# Altium PCB FCM_Integrated.PcbDoc (part 2 of 2)
Units mil, origin at the board's own origin, x right, y up, seen from the top; angles counter-clockwise.
Board outline 7020 x 5005 mil, 4 copper layers (Top Layer, Power, Ground, Bottom Layer), stack 23.756 mil thick; 143 components, 84 nets, 455 pads, 96 vias.
Unrouted connection lines stored in the file: 35.
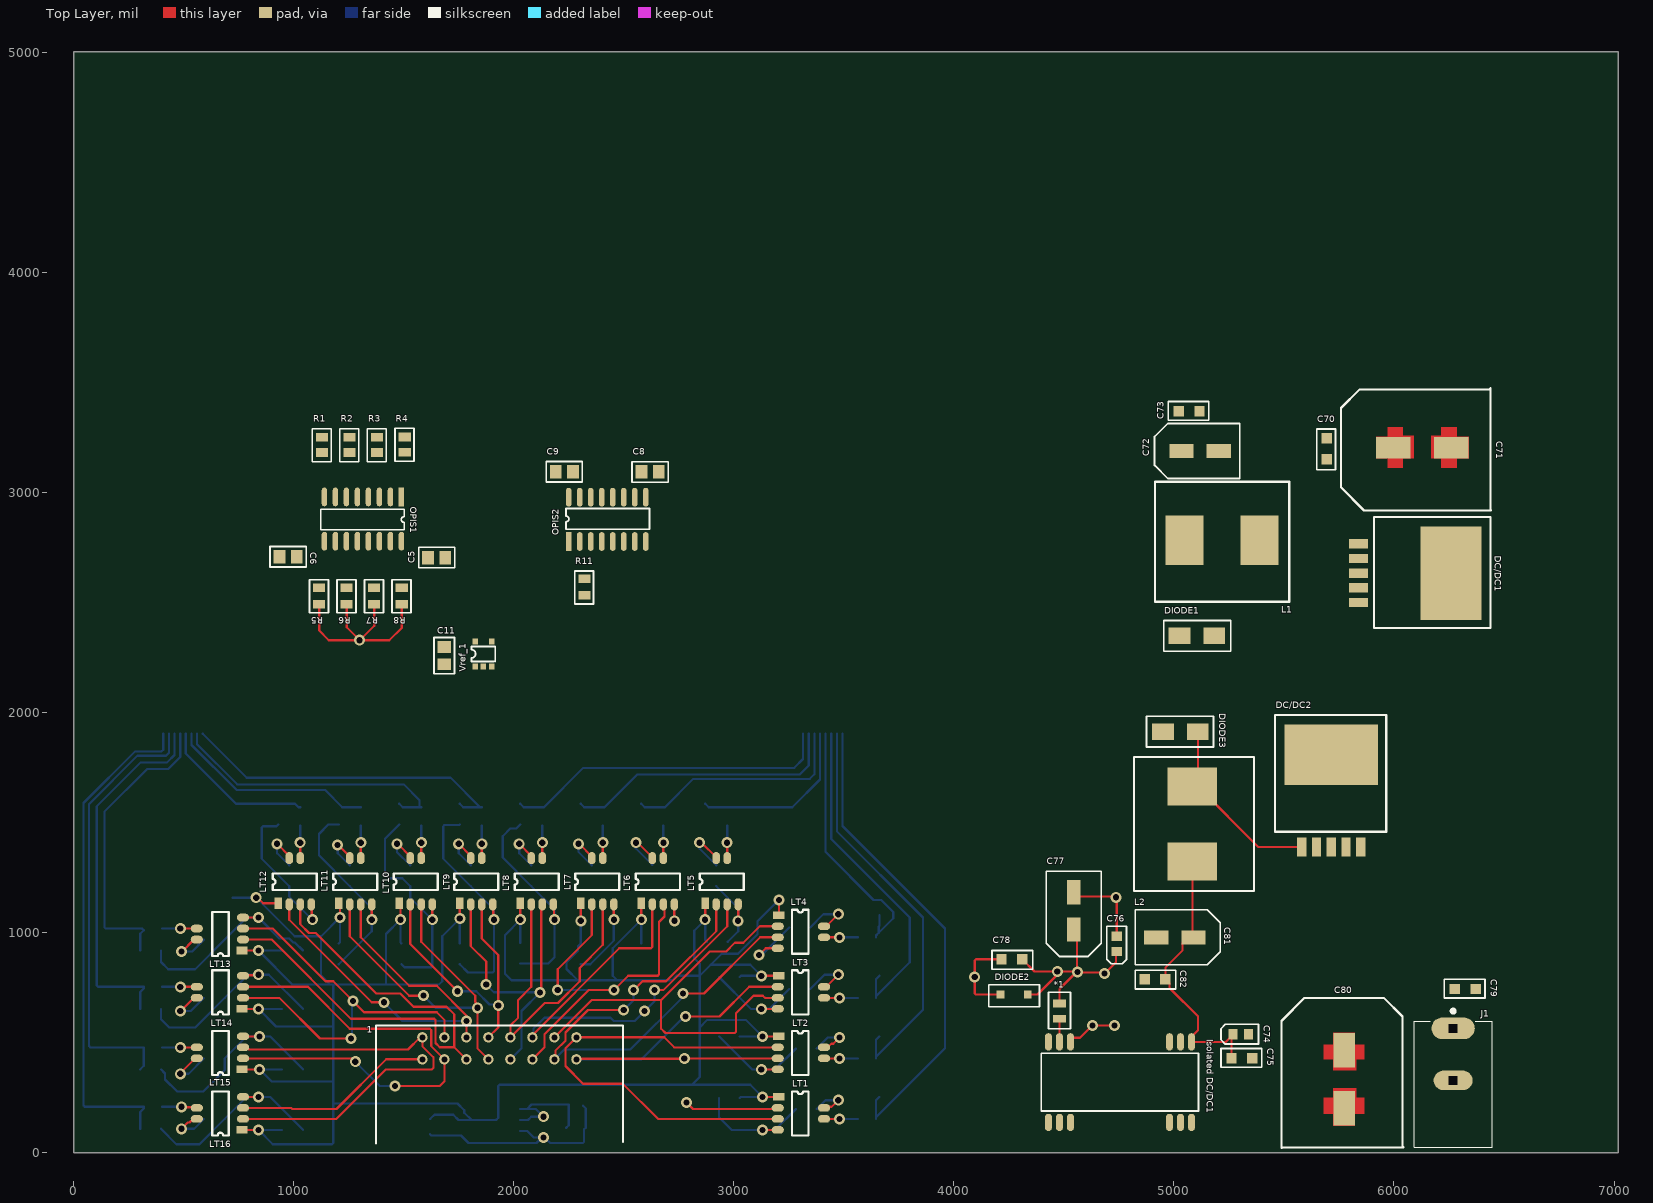
[diagram p0: Top Layer view]

## Via types
v1: diameter 50, hole 28, Top Layer to Bottom Layer, 96 vias

## Nets (pads, with @x,y where several pads share a name; then routed paths per layer and width w, separated by ;. In a path a pad name is that pad's centre, name@x,y a point inside that pad or via, vN(x,y) a via of type N, cw(c..) or ccw(c..) an arc to the next point about the centre after c; other vN are vias at no path point) (continued)
Cell_10_Voltage: (continued)
  Bottom Layer w10: ADC2.2 561.18,1857.1 743.28,1675 1500,1675 1572.13,1602.87 R26.2@1572.13,1571.34 ; C56.2 1495.91,1571.34 R26.2@1572.13,1571.34 ; R26.2 R26.2@1572.13,1571.34
Cell_11_Voltage: ADC2.3 C62.2 R28.2 | length 937.3
  Bottom Layer w10: ADC2.3 535.59,1854.41 740,1650 1142.24,1650 1220.91,1571.34 R28.2
Cell_12_Voltage: ADC2.4 C68.2 R30.2 | length 710.9
  Bottom Layer w10: ADC2.4 510,1815 737.76,1587.24 C68.2 1006.22,1587.24 1022.13,1571.34 R30.2
Cell_13_Voltage: ADC2.5 C51.2 R25.2 | length 1360.5
  Bottom Layer w10: C51.2 302.76,996.22 318.66,1012.13 310.79,1020 145.86,1020 140,1025.86 140,1550 335,1745 430,1745 484.41,1799.41 ADC2.5
Cell_14_Voltage: ADC2.6 C57.2 R27.2 | length 1683.7
  Bottom Layer w10: C57.2 302.76,731.22 318.66,747.13 R27.2 110.86,755 105,760.86 105,1575 305,1775 425,1775 458.82,1808.82 ADC2.6
Cell_15_Voltage: ADC2.7 C63.2 R29.2 | length 2003.4
  Bottom Layer w10: C63.2 318.66,395.91 R29.2 75.86,480 70,485.86 70,1585 290,1805 420,1805 433.23,1818.23 ADC2.7
Cell_16_Voltage: ADC2.8 C69.2 R31.2 | length 2292.3
  Bottom Layer w10: C69.2 302.76,186.22 318.66,202.13 R31.2 50.86,210 45,215.86 45,1590 280,1825 400,1825 407.64,1832.64 ADC2.8
Chipsel1_HS: ADC1.18 OPIS1.12 R6.2
Chipsel1_LS: R2.2
Chipsel2_HS: ADC2.18 OPIS1.14 R8.2
Chipsel2_LS: R4.2
D_CLK_LS: R1.2
D_In_HS: ADC1.17 ADC2.17 OPIS1.13 R7.2
D_in_LS: R3.2
D_out_HS: ADC1.15 ADC2.15 R11.1
D_out_L: OPIS2.14 R9.1
DCLK_HS: ADC1.19 ADC2.19 OPIS1.11 R5.2
ESP_Boot: 
ESP_Enable: 
ESPout-PICin: 
GND_H: "Isolated DC/DC1.4" ADC1.9 ADC1.13 ADC1.14 ADC2.9 ADC2.13 ADC2.14 C1.2 C2.2 C3.1 C4.1 C5.1 C6.1 C10.2 C11.1 C12.1 C13.1 C14.2 C15.2 C16.1 C17.1 C18.2 C19.2 C20.1 C21.2 C22.1 C23.1 C24.1 C25.1 C26.1 C27.1 C28.1 C29.1 C30.1 C31.1 C32.1 C33.1 C34.1 C35.1 C36.1 C37.1 C38.1 C39.1 C40.1 C41.1 C42.1 C43.1 C44.1 C45.1 C46.1 C47.1 C48.1 C49.1 C50.1 C51.1 C52.1 C53.1 C54.1 C55.1 C56.1 C57.1 C58.1 C59.1 C60.1 C61.1 C62.1 C63.1 C64.1 C65.1 C66.1 C67.1 C68.1 C69.1 C76.2 C77.2 C78.1 DIODE2.A LT1.2 LT1.4 LT2.4 LT3.4 LT4.4 LT5.4 LT6.4 LT7.4 LT8.4 LT9.4 LT10.4 LT11.4 LT12.4 LT13.4 LT14.4 LT15.4 LT16.4 OPIS1.9 OPIS1.16 R15.1 U1.4 Vref_1.2 | length 13592.3
  Top Layer w10: LT16.4 v1(840,255) ; LT15.4 v1(845,530) ; LT14.4 772.5,807.5 837.5,807.5 v1(840,810) ; LT13.4 v1(840,1070) ; LT12.4 1082.5,1127.5 1082.5,1062.5 v1(1085,1060) ; v1(1355,1060) LT11.4 ; v1(1630,1060) LT10.4 ; LT9.4 1907.5,1127.5 1907.5,1062.5 v1(1910,1060) ; LT8.4 2182.5,1127.5 2182.5,1062.5 v1(2185,1060) ; v1(2455,1060) LT7.4 ; v1(2730,1055) LT6.4 ; v1(2785,230) 2814.78,200.22 3195.22,200.22 LT1.2 ; v1(3020,1055) LT5.4 ; v1(3115,900) 3145,930 LT4.4 ; v1(3125,380) LT2.4 ; v1(3125,655) LT3.4 ; v1(3130,105) LT1.4 ; DIODE2.A 4100.86,720 4095,725.86 4095,874.14 4100.86,880 C78.1 ; 4530,505 4530,513.69 4539.93,523.62 4573.62,523.62 v1(4630,580) v1(4730,580) ; C77.2 4564.65,1165 4734.14,1165 4740,1159.14 C76.2
  Bottom Layer w10: C69.1 467.24,40 572.24,40 C67.1 787.24,255 v1(840,255) 892.24,255 C66.1 ; C63.1 415.87,361.38 415.87,334.13 470,280 590,280 687.24,377.24 C61.1 787.24,530 v1(845,530) 892.24,530 C60.1 ; C57.1 397.24,607.76 435,570 552.24,570 C55.1 792.24,810 v1(840,810) 887.24,810 C54.1 ; C51.1 397.24,867.76 430,835 552.24,835 C49.1 787.24,1070 v1(840,1070) 935,975 980,975 998.19,956.81 1005.43,956.81 C48.1 ; C68.1 922.24,1485 860.86,1485 855,1479.14 855,1337.76 C65.1 980,1165 v1(1085,1060) ; C58.1 1355,1007.76 v1(1355,1060) 1355,1112.76 C59.1 1115,1352.76 1115,1450 1157.76,1492.76 C62.1 ; C56.1 1415,1427.76 1415,1265.86 1432.24,1248.62 1494.14,1248.62 C53.1 1530,1160 v1(1630,1060) 1630,850 1630.86,849.14 1625.86,844.14 1503.61,844.14 C52.1 ; C21.2 1625.25,79.75 C20.1 1760.25,79.75 1795,45 2103.43,45 v1@2128.43,70 ; C46.1 1792.76,820 1904.14,820 1910,825.86 v1(1910,1060) 1910,1107.76 C47.1 1680,1337.76 1680,1484.14 1685.86,1490 1752.24,1490 C50.1 ; U1.4 2060.98,100 2090.98,70 v1@2128.43,70 ; C43.1 2155.51,860.51 2185,890 v1(2185,1060) 2185,1107.76 C44.1 1950,1342.76 1950,1440 1984.13,1474.13 2011.38,1474.13 C45.1 ; C40.1 2347.76,857.76 2455,965 v1(2455,1060) ; C18.2 2327.24,202.76 C19.2 2320,107.76 2320,50.86 2314.14,45 2166.57,45 2141.57,70 v1(2135,70) v1@2128.43,70 ; C35.1 3020,1112.76 v1(3020,1055) 3020,1007.76 C34.1 ; C22.1 2932.76,162.24 2990,105 v1(3130,105) 3187.76,105 C23.1 ; C25.1 3082.76,380 v1(3125,380) 3187.76,380 C26.1 ; C28.1 3077.76,655 v1(3125,655) 3127.24,657.24 3165,657.24 C29.1 ; v1(3115,900) 3122.65,907.65 3135.41,907.65 C32.1
  other v1: 4095,800 4737.07,1162.07
GND_L: "Isolated DC/DC1.2" "Isolated DC/DC1.3" C8.1 C9.1 C70.1 C71.2 C72.2 C73.1 C74.2 C75.1 C79.1 C80.2 C81.2 C82.1 DC/DC1.3 DC/DC1.5 DC/DC1.6 DC/DC2.3 DC/DC2.5 DC/DC2.6 DIODE1.A DIODE3.A J1.2 OPIS2.9 OPIS2.16
Net1_1: 1.1 LT1.3 LT2.2 | length 2149.7
  Top Layer w10: LT1.3 2655.67,155 2495.67,315 2315,315 2235,395 2235,475.67 1.1 2684.33,525.67 2730,480 LT2.2
Net1_2: 1.2 LT2.3 LT3.2 | length 1983.5
  Top Layer w10: 1.2 2287.16,427.83 2772.84,427.83 v1(2775,430) LT2.3 ; v1(2780,620) 2935,620 3070,755 LT3.2
  Bottom Layer w10: 1.2@2287.16,427.83 1.2 2580.67,425.67 v1@2785,630 ; v1@2772.84,427.83 v1(2775,430)
Net1_3: 1.3 LT3.3 LT4.2 | length 2016
  Top Layer w10: 1.3 2354.33,695 2670,695 ; LT3.3 3141.59,705 3131.59,715 3090,715 3010,635 3010,550.86 3004.14,545 2690,545 2670,565 2670,695 ; LT4.2 3118.65,1030 3043.65,955 3005,955 2965,915 2890,915 2670,695
Net1_4: 1.4 LT4.3 LT5.2 | length 2429.8
  Top Layer w10: 1.4 2189.29,429.96 2189.29,464.29 2235,510 2235,547.39 2337.61,650 v1(2500,650) ; v1(2545,740) 2585,780 2691.72,780 2920,1008.28 LT5.2 ; v1(2770,725) 2865,725 3120,980 LT4.3
  Bottom Layer w10: 1.4 2229.33,470 2530,470 2770,710 v1(2770,725) v1@2770,735 ; v1(2500,650) 2545,695 v1(2545,740)
Net1_5: 1.5 LT5.3 LT6.2 | length 2170.2
  Top Layer w10: 1.5 2085,535 2480,930 2624.14,930 2630,935.86 LT6.2 ; v1(2640,740) 2680,740 2970,1030 LT5.3
  Bottom Layer w10: 1.5 2089.29,529.96 2089.29,564.29 2140,615 2440,615 2455,600 2550,600 v1(2595,645) 2640,690 v1(2640,740)
Net1_6: 1.6 LT6.3 LT7.2 | length 1810.1
  Top Layer w10: 1.6 2140,480.67 2140,540 2340,740 v1(2455,740) 2520,805 2654.14,805 2660,810.86 2660,1050 2685,1075 2685,1088.18 2684.78,1088.39 2684.78,1125.22 LT6.3 ; v1(2200,740) 2200,835 2355,990 LT7.2
  Bottom Layer w10: v1(2200,740) v1(2455,740)
Net1_7: 1.7 LT7.3 LT8.2 | length 1457.5
  Top Layer w10: LT8.2 2080,755 2020,695 2020,615 1985,580 1.7 2140.71,681.38 2201.38,681.38 2300,780 2300,840.67 2405,945.67 LT7.3
Net1_8: 1.8 LT8.3 LT9.2 | length 1417.9
  Top Layer w10: LT9.2 1805,940 1875,870 v1(1875,765) ; v1(2120,730) 2125.22,735.22 2125.22,1125.22 LT8.3
  Bottom Layer w10: v1(1875,765) 1910,730 v1(2120,730) 2035,645 2035,475.67 1.8
Net1_9: 1.9 LT9.3 LT10.2 | length 1350
  Top Layer w10: LT10.2 1530,950 v1(1745,735) ; LT9.3 1855,975 1930,900 v1(1930,670) 1930,570.67 1.9
  Bottom Layer w10: v1(1745,735) 1830,735 1890,675 1925,675 v1(1930,670)
Net1_10: 1.10 LT10.3 LT11.2 | length 1690.3
  Top Layer w10: LT11.2 1255,985 1525,715 v1(1590,715) ; LT10.3 1580,960 1825,715 1825,685.86 1827.35,683.51 1827.35,667.65 v1(1835,660) 1835,475.67 1.10
  Bottom Layer w10: v1(1590,715) 1645,660 v1(1835,660)
Net1_11: 1.11 LT11.3 LT12.2 | length 1941.9
  Top Layer w10: LT12.2 980,1060 1355,685 v1(1410,685) ; LT11.3 1305,980 1525,760 1650,760 1785,625 v1(1785,600) 1.11
  Bottom Layer w10: v1(1410,685) 1495,600 v1(1785,600)
Net1_12: 1.12 LT12.3 LT13.2 | length 2410.6
  Top Layer w10: LT13.2 900,970 1260,610 1639.14,610 1645,604.14 1645,500 1664.33,480.67 1730,480.67 ; LT12.3 1030,1040 1070,1000 1100,1000 1375,725 1485,725 1545,665 1695,665 1730,630 1730,480.67 ; 1.12 1730,480.67
Net1_13: 1.13 LT13.3 LT14.2 | length 1907
  Top Layer w10: LT14.2 935,705 1120,520 v1(1260,520) ; LT13.3 905,1020 1145,780 1180,780 1320,640 1650,640 1685,605 1.13
  Bottom Layer w10: v1(1260,520) 1265,525 1265,685 v1(1270,690)
Net1_14: 1.14 LT14.3 LT15.2 | length 2170.2
  Top Layer w10: LT15.2 1265,430 v1(1280,415) ; LT14.3 1065,755 1255,565 1619.14,565 1625,559.14 1625,485.67 1.14 1685,325 1665,305 v1(1460,305)
  Bottom Layer w10: v1(1280,415) 1390,305 v1(1460,305)
Net1_15: 1.15 LT15.3 LT16.2 | length 1963.3
  Top Layer w10: LT16.2 1195,155 1420,380 1629.14,380 1635,385.86 1635,435 1585,485 1.15 1575.67,525.67 1520,470 796.82,470 786.82,480 LT15.3
Net1_16: 1.16 LT16.3 | length 910.5
  Top Layer w10: LT16.3 988.41,205 993.41,200 1195,200 1420.67,425.67 1.16
Net*1_2: "Isolated DC/DC1.5" *1.2 | length 113.6
  Top Layer w10: 4480,505 *1.2 *1.2@4486.06,603.94
NetC86_1: 
NetC87_2: 
NetDC/DC1_1: DC/DC1.1 DIODE1.K L1.1
NetDC/DC2_1: DC/DC2.1 DIODE3.K L2.1 | length 871.5
  Top Layer w10: DIODE3.K 5108.94,1690 L2.1 5109.53,1665 5384.53,1390 DC/DC2.1
NetESP32_23: 
NetESP32_24: 
NetLT1_6: LT1.6 R16.1 | length 153.7
  Top Layer w10: LT1.6 v1(3480,155)
  Bottom Layer w10: v1(3480,155) R16.1
NetLT2_6: LT2.6 R17.1 | length 153.7
  Top Layer w10: LT2.6 v1(3480,430)
  Bottom Layer w10: v1(3480,430) R17.1
NetLT3_6: LT3.6 R18.1 | length 153.7
  Top Layer w10: LT3.6 v1(3480,705)
  Bottom Layer w10: v1(3480,705) R18.1
NetLT4_6: LT4.6 R19.1 | length 153.7
  Top Layer w10: LT4.6 v1(3480,980)
  Bottom Layer w10: v1(3480,980) R19.1
NetLT5_6: LT5.6 R20.1 | length 158.7
  Top Layer w10: LT5.6 v1(2970,1410)
  Bottom Layer w10: v1@2970,1400 v1(2970,1410) R20.1
NetLT6_6: LT6.6 R21.1 | length 158.7
  Top Layer w10: LT6.6 v1(2680,1410)
  Bottom Layer w10: v1@2680,1400 v1(2680,1410) R21.1
NetLT7_6: LT7.6 R22.1 | length 158.7
  Top Layer w10: LT7.6 v1(2405,1410)
  Bottom Layer w10: v1@2405,1400 v1(2405,1410) R22.1
NetLT8_6: LT8.6 R23.1 | length 158.7
  Top Layer w10: LT8.6 v1(2130,1410)
  Bottom Layer w10: v1@2130,1400 v1(2130,1410) R23.1
NetLT9_6: LT9.6 R24.1 | length 148.7
  Top Layer w10: LT9.6 v1(1855,1405)
  Bottom Layer w10: v1(1855,1405) R24.1
NetLT10_6: LT10.6 R26.1 | length 158.7
  Top Layer w10: LT10.6 v1(1580,1410)
  Bottom Layer w10: v1@1580,1400 v1(1580,1410) R26.1
NetLT11_6: LT11.6 R28.1 | length 158.7
  Top Layer w10: LT11.6 v1(1305,1410)
  Bottom Layer w10: v1@1305,1400 v1(1305,1410) R28.1
NetLT12_6: LT12.6 R30.1 | length 158.7
  Top Layer w10: LT12.6 v1(1030,1410)
  Bottom Layer w10: v1@1030,1400 v1(1030,1410) R30.1
NetLT13_6: LT13.6 R25.1 | length 158.7
  Top Layer w10: v1(485,1020) LT13.6
  Bottom Layer w10: R25.1 v1(485,1020)
NetLT14_6: LT14.6 R27.1 | length 168.7
  Top Layer w10: v1(485,755) LT14.6
  Bottom Layer w10: R27.1 v1(485,755) v1@495,755
NetLT15_6: LT15.6 R29.1 | length 168.7
  Top Layer w10: v1(485,480) LT15.6
  Bottom Layer w10: R29.1 v1(485,480) v1@495,480
NetLT16_6: LT16.6 R31.1 | length 160.7
  Top Layer w10: v1(490,210) 492.5,207.5 557.5,207.5 LT16.6
  Bottom Layer w10: R31.1 v1(490,210)
NetR13_1: R13.1 R15.2 Vref_1.1
NetR13_2: R13.2 R14.1
PICout-ESPin: 
V_Ref: ADC1.11 ADC2.11 C11.2 R14.2 Vref_1.5
pads on no net: "Isolated DC/DC1.6" "Isolated DC/DC1.7" "Isolated DC/DC1.8" "Isolated DC/DC1.9" "Isolated DC/DC1.10" "Isolated DC/DC1.11" "Isolated DC/DC1.12" ADC1.16 ADC2.16 OPIS2.3 OPIS2.4 OPIS2.5 OPIS2.6 OPIS2.7 OPIS2.8 OPIS2.11 OPIS2.12 OPIS2.13 U1.1 U1.5 U1.7 U1.8

## Polygon pours and split planes (outlines as drawn)
+3V3 on Power (split plane): 6999.9,20.1 4809.01,20.1 4809.01,2890 4808.71,2891.54 4807.84,2892.84 4806.54,2893.71 4805,2894.01 20.1,2894.01 20.1,4984.9 6999.9,4984.9
+5 on Power (split plane): 4800.99,20.1 20.1,20.1 20.1,2885.99 4800.99,2885.99
GND_L on Ground (split plane): 6999.9,20.1 4809.01,20.1 4809.01,2890 4808.71,2891.54 4807.84,2892.84 4806.54,2893.71 4805,2894.01 20.1,2894.01 20.1,4984.9 6999.9,4984.9
GND_H on Ground (split plane): 4800.99,20.1 20.1,20.1 20.1,2885.99 4800.99,2885.99

## Other copper
Power (plane layer: these items are gaps in the copper):
  lines w7.87: 0,2890 4805,2890 4805,8.94
Ground (plane layer: these items are gaps in the copper):
  lines w7.87: 0,2890 4805,2890 4805,8.94